# EAGLE board IRAMX-drv-v3.2 (EAGLE 7.2.0)
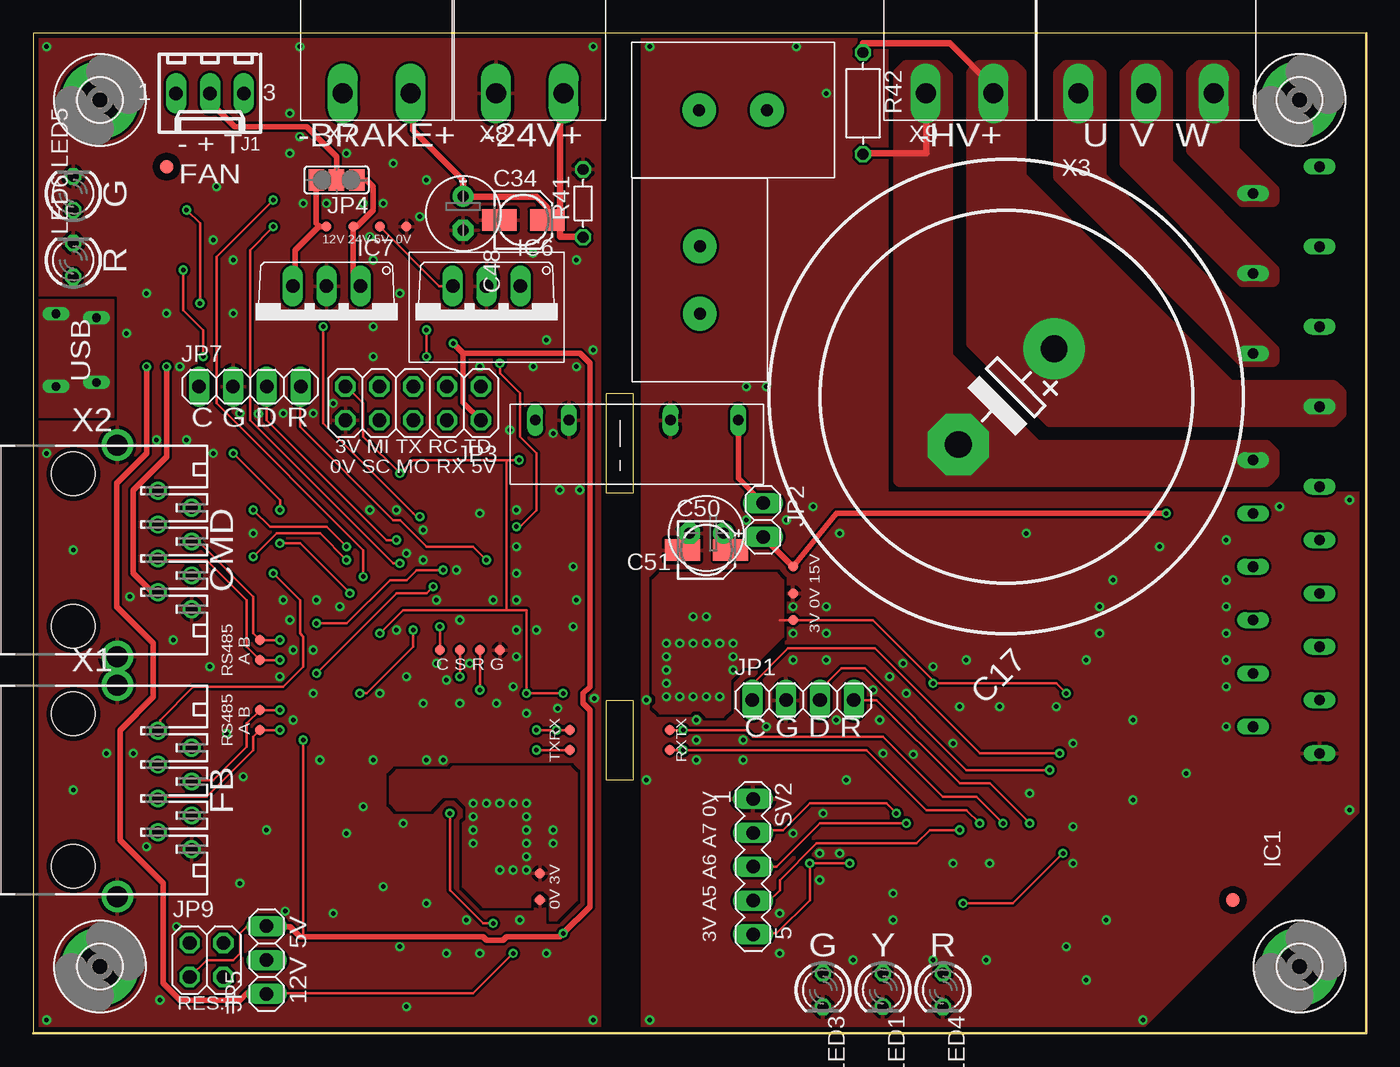
[diagram p0: board, top side]
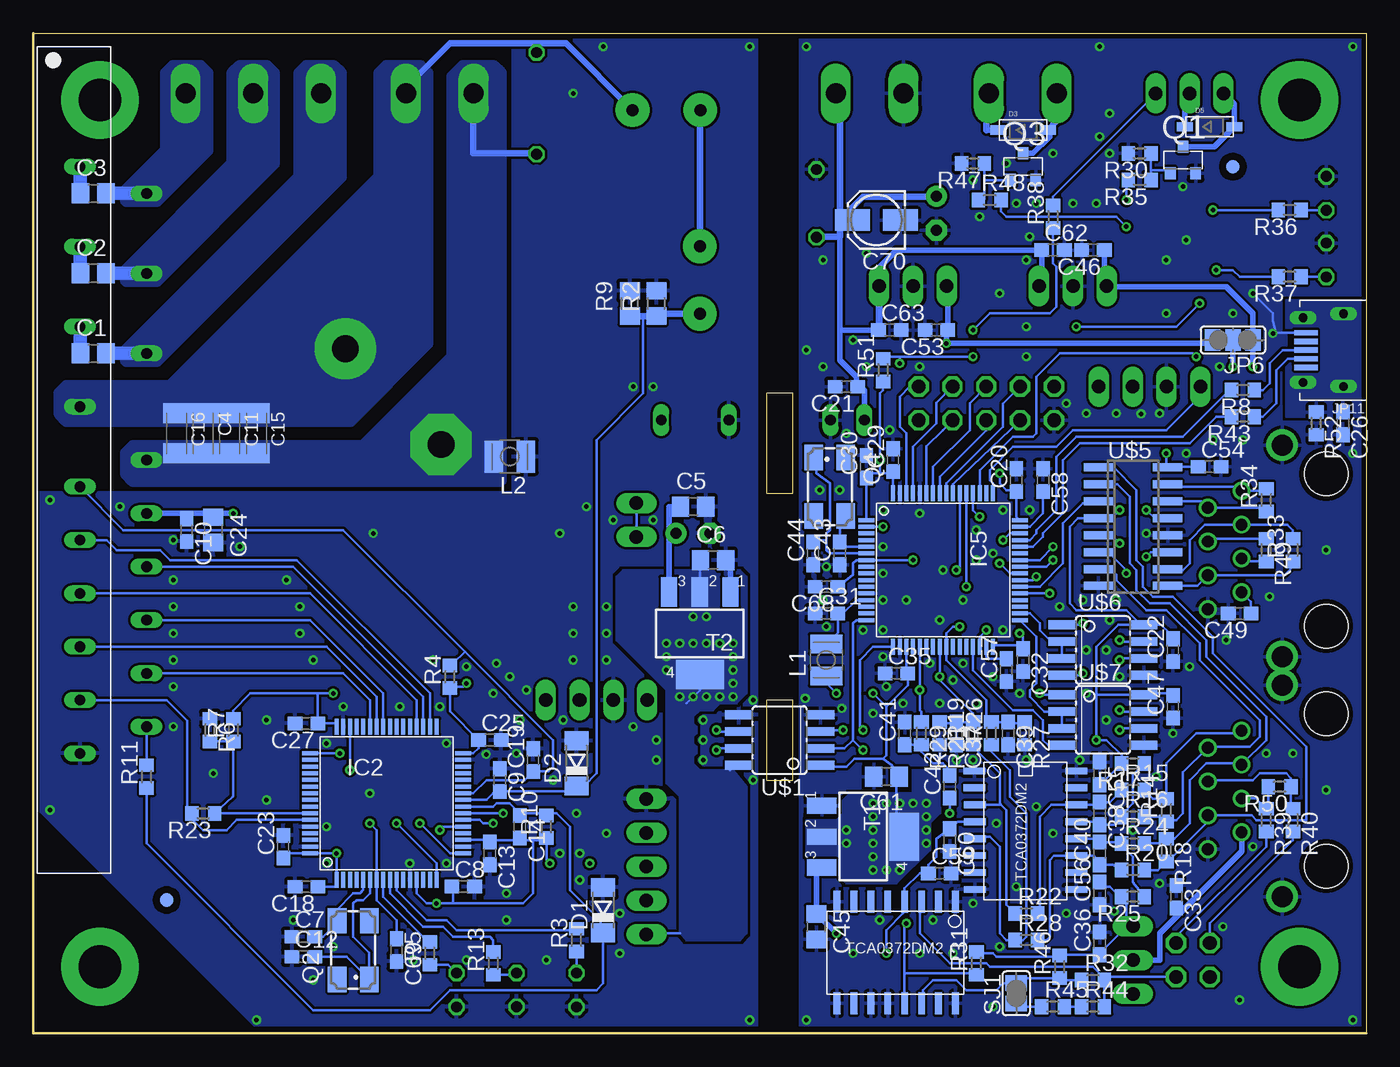
[diagram p1: board, bottom side, seen from below]

Size 100 x 75 mm. Coordinates in mm from the lower left corner, seen from the top.
Outline: 0,0 100,0 100,75 0,75 0,0
Outline: 43,48 45,48 45,40.5 43,40.5 43,48
Outline: 43,25 45,25 45,19 43,19 43,25
Copper layers (1*16): Top 0.0356mm / dielectric 1.5011mm / Bottom 0.0356mm
Design rules "osh *": minimum track width 6mil, minimum drill 13mil, track to track 6mil, track to pad 6mil, pad to pad 6mil, via to via 6mil, smd to smd 6mil, copper to edge 15mil, drill to drill 6mil, minimum pad ring 7mil, minimum via ring 7mil, stop-mask expansion 3mil, vias tented up to drill 13mil, thermal gap 10mil
Net classes: 0 default: width 0.2 mm, drill 0.1 mm, clearance 0.19 mm; 1 dick: width 3.5 mm, clearance 1 mm; 2 iso: width 0.5 mm, clearance 1 mm; 3 iso1: width 0.5 mm, clearance 1 mm; 4 iso2: width 0.5 mm, clearance 1 mm; 5 iso3: width 0.5 mm, clearance 1 mm; 6 iso4: width 0.5 mm, clearance 1 mm

## Footprints (pad centres in the part's own frame; a part is rotated, then mirrored left to right if it is on the bottom)
C0805 = smd 1.3 x 1.5: 1 -0.95,0; 2 0.95,0
C1206K = smd 1.5 x 2: 1 -1.5,0; 2 1.5,0
C0603 = smd 1.1 x 1: 1 -0.85,0; 2 0.85,0
EB35D = drill 2.007 pad 4.597: + -5.08,0 | drill 2.007 pad 4.597 octagon: - 5.08,0
153CLV-0405 = smd 2.6 x 1.6: + 1.8,0; - -1.8,0
E2,5-6E = drill 0.813 pad 1.575: + -1.27,0 | drill 0.813 pad 1.575 octagon: - 1.27,0
SOD80C = smd 1.4 x 1.8: A 1.7,0; C -1.7,0
SOD-123 = smd 1.2 x 0.7: A 1.85,0; C -1.85,0
3,2-PAD = drill 3.2 pad 5.842: B3,2 0,0
SIP23_TOP = drill 0.8 long: 1 2,-5; 2 0,0; 4 -4,-5; 5 -6,0; 7 -10,-5; 8 -12,0; 10 -16,-5; 12 -20,0; 13 -22,-5; 14 -24,0; 15 -26,-5; 16 -28,0; 17 -30,-5; 18 -32,0; 19 -34,-5; 20 -36,0; 21 -38,-5; 22 -40,0; 23 -42,-5
LQFP64 = smd 0.3 x 1.2: 1 -3.75,-5.75; 2 -3.25,-5.75; 3 -2.75,-5.75; 4 -2.25,-5.75; 5 -1.75,-5.75; 6 -1.25,-5.75; 7 -0.75,-5.75; 8 -0.25,-5.75; 9 0.25,-5.75; 10 0.75,-5.75; 11 1.25,-5.75; 12 1.75,-5.75; 13 2.25,-5.75; 14 2.75,-5.75; 15 3.25,-5.75; 16 3.75,-5.75; 33 3.75,5.75; 34 3.25,5.75; 35 2.75,5.75; 36 2.25,5.75; 37 1.75,5.75; 38 1.25,5.75; 39 0.75,5.75; 40 0.25,5.75; 41 -0.25,5.75; 42 -0.75,5.75; 43 -1.25,5.75; 44 -1.75,5.75; 45 -2.25,5.75; 46 -2.75,5.75; 47 -3.25,5.75; 48 -3.75,5.75 | smd 1.2 x 0.3: 17 5.75,-3.75; 18 5.75,-3.25; 19 5.75,-2.75; 20 5.75,-2.25; 21 5.75,-1.75; 22 5.75,-1.25; 23 5.75,-0.75; 24 5.75,-0.25; 25 5.75,0.25; 26 5.75,0.75; 27 5.75,1.25; 28 5.75,1.75; 29 5.75,2.25; 30 5.75,2.75; 31 5.75,3.25; 32 5.75,3.75; 49 -5.75,3.75; 50 -5.75,3.25; 51 -5.75,2.75; 52 -5.75,2.25; 53 -5.75,1.75; 54 -5.75,1.25; 55 -5.75,0.75; 56 -5.75,0.25; 57 -5.75,-0.25; 58 -5.75,-0.75; 59 -5.75,-1.25; 60 -5.75,-1.75; 61 -5.75,-2.25; 62 -5.75,-2.75; 63 -5.75,-3.25; 64 -5.75,-3.75
R-78E = drill 1.016 long: 1 -2.54,-2.54; 2 0,-2.54; 3 2.54,-2.54
TO220V = drill 1.016 long: 1 -2.54,-2.54; 2 0,-2.54; 3 2.54,-2.54
6410-03 = drill 1.016 long: 1 2.54,0; 2 0,0; 3 -2.54,0
1X04 = drill 1.016 long: 1 -3.81,0; 2 -1.27,0; 3 1.27,0; 4 3.81,0
1X02 = drill 1.016 long: 1 -1.27,0; 2 1.27,0
2X05 = drill 1.016 octagon: 1 -5.08,-1.27; 2 -5.08,1.27; 3 -2.54,-1.27; 4 -2.54,1.27; 5 0,-1.27; 6 0,1.27; 7 2.54,-1.27; 8 2.54,1.27; 9 5.08,-1.27; 10 5.08,1.27
SJ_2 = smd 1.168 x 1.6: 1 -1.524,0; 2 0,0; 3 1.524,0
1X03 = drill 1.016 long: 1 -2.54,0; 2 0,0; 3 2.54,0
2X02 = drill 1.016 octagon: 1 -1.27,-1.27; 2 -1.27,1.27; 3 1.27,-1.27; 4 1.27,1.27
FCI-10103594-0001LF = smd 0.4 x 1.75: 1 -1.3,4.525; 2 -0.65,4.525; 3 0,4.525; 4 0.65,4.525; 5 1.3,4.525 | drill 0.65 pad 1 long: 6 2.425,4.73; 7 2.725,1.7; 8 -2.725,1.7; 9 -2.425,4.73
L2825P = smd 1.4 x 2.4: 1 -1.2,0; 2 1.2,0
LED3MM = drill 0.813 octagon: A -1.27,0; K 1.27,0
MICRO3 = smd 0.8 x 0.9: 1 -0.95,-1; 2 0.95,-1; 3 0,1
CTS406 = smd 1.9 x 1.4: 1 -2.2,-1.2; 2 2.2,-1.2; 3 2.2,1.2; 4 -2.2,1.2
CER = drill 0.9 pad 2.54: P$1 -2.54,0; P$2 2.54,0
R0805 = smd 1.3 x 1.5: 1 -0.95,0; 2 0.95,0
R0603 = smd 1 x 1.1: 1 -0.85,0; 2 0.85,0
R-5 = drill 0.813 octagon: 1 -2.54,0; 2 2.54,0
R-7,5 = drill 0.813 octagon: 1 -3.81,0; 2 3.81,0
SJ = smd 1.168 x 1.6: 1 -0.762,0; 2 0.762,0
MA05-1 = drill 1.016 long: 1 -5.08,0; 2 -2.54,0; 3 0,0; 4 2.54,0; 5 5.08,0
SOT223 = smd 1.219 x 2.235: 1 -2.311,-3.099; 2 0,-3.099; 3 2.311,-3.099 | smd 3.6 x 2.2: 4 0,3.099
PAD.03X.03 = smd 0.762 x 0.762: P$1 0,0
SOIC08 = smd 0.66 x 2.032: 1 -1.905,-3.073; 2 -0.635,-3.073; 3 0.635,-3.073; 4 1.905,-3.073; 5 1.905,3.073; 6 0.635,3.073; 7 -0.635,3.073; 8 -1.905,3.073
SIP7 = drill 0.8 long: 1 -6.35,0; 2 -3.81,0; 3 3.81,0; 4 8.89,0
TCA0372DM2 = smd 0.508 x 1.651: 1 -4.434,-3.878; 2 -3.163,-3.878; 3 -1.893,-3.868; 4 -0.624,-3.868; 5 0.646,-3.868; 6 1.917,-3.868; 7 3.187,-3.868; 8 4.457,-3.868; 9 4.457,3.748; 10 3.187,3.748; 11 1.917,3.748; 12 0.646,3.748; 13 -0.624,3.748; 14 -1.893,3.748; 15 -3.163,3.748; 16 -4.434,3.748
SO16 = smd 0.6 x 2.2: 1 -4.445,-2.6; 2 -3.175,-2.6; 3 -1.905,-2.6; 4 -0.635,-2.6; 5 0.635,-2.6; 6 1.905,-2.6; 7 3.175,-2.6; 8 4.445,-2.6; 9 4.445,2.6; 10 3.175,2.6; 11 1.905,2.6; 12 0.635,2.6; 13 -0.635,2.6; 14 -1.905,2.6; 15 -3.175,2.6; 16 -4.445,2.6
FIDUCIAL_1MM = smd 1 x 1: 1 0,0
RJ45 = drill 0.889: 1 -4.445,6.35; 2 -3.175,8.89; 3 -1.905,6.35; 4 -0.635,8.89; 5 0.635,6.35; 6 1.905,8.89; 7 3.175,6.35; 8 4.445,8.89 | drill 1.575 pad 2.184: G3 -7.874,3.302; G4 8.001,3.302 | hole 3.251: -5.715,0; 5.715,0
AKL230-03 = drill 1.5 long: 1 -5.08,0; 2 0,0; 3 5.08,0
AKL230-02 = drill 1.5 long: 1 -2.54,0; 2 2.54,0

## Placement (x,y rotation side)
C1  4.7u  [C0805]  95.5,51 0 bottom
C2  4.7u  [C0805]  95.5,57.01 0 bottom
C3  4.7u  [C0805]  95.5,63 0 bottom
C4  100p  [C1206K]  87.25,45 270 bottom
C5  4.7u  [C0805]  50.5,39.5 0 bottom
C6  4.7u  [C0805]  49,35.5 0 bottom
C7  18p  [C0603]  79.75,7.25 0 bottom
C8  100n  [C0603]  67.75,11 0 bottom
C9  100n  [C0603]  65,19 270 bottom
C10  100n  [C0603]  88.5,37.75 270 bottom
C11  10n  [C1206K]  85.25,45 270 bottom
C12  18p  [C0603]  79.75,5.75 0 bottom
C13  100n  [C0603]  65.75,13.5 270 bottom
C14  100n  [C0603]  63.5,15.5 270 bottom
C15  100p  [C1206K]  83.25,45 270 bottom
C16  10n  [C1206K]  89.25,45 270 bottom
C17  820µ  [EB35D]  73,47.75 225 top
C18  100n  [C0603]  79.5,11 180 bottom
C19  100n  [C0603]  62.5,20.5 90 bottom
C20  100n  [C0603]  26.25,41.5 90 bottom
C21  100n  [C0603]  39,48.5 180 bottom
C22  100n  [C0603]  14.5,28.75 90 bottom
C23  100n  [C0603]  81.25,14 90 bottom
C24  4.7u  [C0805]  86.5,37.75 270 bottom
C25  100n  [C0603]  65.75,22 0 bottom
C26  10n  [C0603]  1.75,45.75 270 bottom
C27  100n  [C0603]  79.5,23.25 180 bottom
C29  100n  [C0603]  35.5,43 90 bottom
C30  100n  [C0603]  37.5,42.5 90 bottom
C31  100n  [C0603]  40.5,31.5 0 bottom
C32  100n  [C0603]  25.75,28 270 bottom
C33  100n  [C0603]  14.25,10.25 270 bottom
C34  2.2u  [153CLV-0405]  36.75,61 0 top
C35  100n  [C0603]  35.25,27 0 bottom
C36  100n  [C0603]  20,6.75 90 bottom
C37  1n  [C0603]  30.75,22.5 270 bottom
C38  1n  [C0603]  20,16.5 270 bottom
C39  1n  [C0603]  26.88,22.5 270 bottom
C40  1n  [C0603]  20,13.5 90 bottom
C41  100n  [C0603]  34.62,22.5 90 bottom
C42  100n  [C0603]  31.25,18.5 90 bottom
C43  18p  [C0603]  39.5,36 90 bottom
C44  18p  [C0603]  41.5,36 90 bottom
C45  4.7u  [C0805]  41.25,8 270 bottom
C46  100n  [C0603]  20.5,58.75 180 bottom
C47  100n  [C0603]  14.5,24.5 90 bottom
C48  2.2u  [E2,5-6E]  32.25,61.5 270 top
C49  100n  [C0603]  9.5,31.5 180 bottom
C50  2.2u  [153CLV-0405]  50.5,36.25 0 top
C51  2.2u  [E2,5-6E]  50.5,37.5 180 top
C53  100n  [C0603]  32.25,52.75 180 bottom
C54  100n  [C0603]  11.75,42.5 0 bottom
C55  100n  [C0603]  20,19.5 270 bottom
C56  100n  [C0603]  20,10.5 90 bottom
C57  2.2u  [C0603]  27,27.25 90 bottom
C58  2.2u  [C0603]  24.25,41.5 270 bottom
C59  100n  [C0603]  32,12 0 bottom
C60  100n  [C0603]  31.25,14.5 270 bottom
C61  4.7u  [C0805]  36,19.25 180 bottom
C62  100n  [C0603]  23.5,58.75 0 bottom
C63  100n  [C0603]  35.75,52.75 0 bottom
C68  100n  [C0603]  40.5,33.5 180 bottom
C69  100n  [C0603]  72.75,6.25 270 bottom
C70  2.2u  [153CLV-0405]  36.75,61 180 bottom
D1  3v3  [SOD80C]  57.25,9.25 90 bottom
D2  3v3  [SOD80C]  59.25,20.25 90 bottom
D3  [SOD-123]  25.75,67.75 0 bottom
D5  [SOD-123]  11.75,68 0 bottom
H1  MOUNT-PAD-ROUND3.2  [3,2-PAD]  95,70 0 top
H2  MOUNT-PAD-ROUND3.2  [3,2-PAD]  95,5 0 top
H3  MOUNT-PAD-ROUND3.2  [3,2-PAD]  5,5 0 top
H4  MOUNT-PAD-ROUND3.2  [3,2-PAD]  5,70 0 top
IC1  IRAMX16UP60B  [SIP23_TOP]  91.5,63 90 top
IC2  STM32F103R6T  [LQFP64]  73.49,17.25 0 bottom
IC5  STM32F405RGT  [LQFP64]  31.75,34.75 270 bottom
IC6  78  [R-78E]  34,53.5 180 top
IC7  7812TV  [TO220V]  22,53.5 180 top
J1  22-27-2031-03  [6410-03]  13.25,70.5 180 top
JP1  [1X04]  57.75,25 0 top
JP2  [1X02]  54.75,38.5 270 top
JP3  [2X05]  28.5,47.25 180 top
JP4  [SJ_2]  22.75,64 180 top
JP5  [1X03]  17.5,5.5 90 top
JP6  [SJ_2]  10,52 180 bottom
JP7  [1X04]  16.25,48.5 0 top
JP9  [2X02]  13,5.5 0 top
JP11  USB-RECEPTABLE  [FCI-10103594-0001LF]  0,51.25 90 bottom
L1  [L2825P]  40.5,28 90 bottom
L2  [L2825P]  64.25,43.25 180 bottom
LED1  GELB  [LED3MM]  63.75,3.25 270 top
LED3  GRÜN  [LED3MM]  59.25,3.25 270 top
LED4  ROT  [LED3MM]  68.25,3.25 270 top
LED5  GRÜN  [LED3MM]  3,63 90 top
LED6  ROT  [LED3MM]  3,58 90 top
Q1  IRLML6344  [MICRO3]  13.75,65.5 0 bottom
Q2  [CTS406]  76,6.25 90 bottom
Q3  IRLML6344  [MICRO3]  25.75,65 0 bottom
Q4  [CTS406]  40.25,41 270 bottom
R1  18k  [CER]  52.5,69.25 180 top
R2  560  [R0805]  53.25,54.75 90 bottom
R3  470  [R0603]  59.25,7 90 bottom
R4  10k  [R0603]  68.75,26.75 90 bottom
R5  470  [R0603]  70.25,6 90 bottom
R6  1k  [R0603]  86.75,22.75 270 bottom
R7  1k  [R0603]  85,22.75 90 bottom
R8  22  [R0603]  9.25,48.25 180 bottom
R9  560  [R0805]  55.25,54.75 90 bottom
R10  10k  [R0603]  61.5,15.49 90 bottom
R11  180  [R0603]  91.5,19.25 90 bottom
R12  18k  [CER]  50,56.5 270 top
R13  470  [R0603]  65.5,5.25 90 bottom
R14  470  [R0603]  15,16.75 90 bottom
R15  1k  [R0603]  17.5,18.25 0 bottom
R16  1k  [R0603]  17.5,16.25 0 bottom
R17  3.9k  [R0603]  17.5,20.25 180 bottom
R18  470  [R0603]  15,13.75 270 bottom
R19  330  [R0603]  29.5,22.5 90 bottom
R20  1k  [R0603]  17.5,12.25 0 bottom
R21  180  [R0603]  32,22.5 270 bottom
R22  3.9k  [R0603]  25.5,9 0 bottom
R23  1k  [R0603]  87.25,16.5 180 bottom
R24  1k  [R0603]  17.5,14.25 0 bottom
R25  3.9k  [R0603]  17.5,10.25 180 bottom
R26  330  [R0603]  28.12,22.5 90 bottom
R27  180  [R0603]  25.62,22.5 270 bottom
R28  3.9k  [R0603]  25.5,7 0 bottom
R29  470  [R0603]  33.38,22.5 270 bottom
R30  1k  [R0603]  17,66 180 bottom
R31  1k  [R0603]  29.25,5.25 90 bottom
R32  3.9k  [R0603]  20.5,4 0 bottom
R33  1k  [R0603]  5.5,36.25 90 bottom
R34  1k  [R0603]  7.5,40 90 bottom
R35  33  [R0603]  17,64 180 bottom
R36  470  [R0603]  5.75,61.75 180 bottom
R37  470  [R0603]  5.75,56.75 180 bottom
R38  1k  [R0603]  23.5,61.25 90 bottom
R39  33  [R0603]  7.5,16 270 bottom
R40  33  [R0603]  5.5,16 270 bottom
R41  VARISTOR-5  [R-5]  41.25,62.25 90 top
R42  VARISTOR-7,5  [R-7,5]  62.25,69.75 270 top
R43  22  [R0603]  9.25,46.25 180 bottom
R44  1k  [R0603]  20.5,2 0 bottom
R45  1k  [R0603]  23.5,2 0 bottom
R46  1k  [R0603]  23,5 90 bottom
R47  1k  [R0603]  29.5,65.25 180 bottom
R48  33  [R0603]  28.25,62.5 0 bottom
R49  180  [R0603]  7.5,36.25 270 bottom
R50  180  [R0603]  6.5,18.5 180 bottom
R51  1k  [R0603]  36.25,49.75 90 bottom
R52  10k  [R0603]  3.75,45.75 270 bottom
SJ1  [SJ]  26.25,3 90 bottom
SV2  [MA05-1]  54,12.5 270 top
T1  zldo1117  [SOT223]  37.75,14.75 270 bottom
T2  zldo1117  [SOT223]  50,30 180 bottom
TP1  TEST-POINT3  [PAD.03X.03]  40.25,21.25 0 top
TP2  TEST-POINT3  [PAD.03X.03]  40.25,22.75 0 top
TP3  TEST-POINT3  [PAD.03X.03]  33.5,28.75 0 top
TP4  TEST-POINT3  [PAD.03X.03]  32,28.75 0 top
TP5  TEST-POINT3  [PAD.03X.03]  30.5,28.75 0 top
TP6  TEST-POINT3  [PAD.03X.03]  17,24.25 0 top
TP7  TEST-POINT3  [PAD.03X.03]  17,22.75 0 top
TP8  TEST-POINT3  [PAD.03X.03]  17,29.5 0 top
TP9  TEST-POINT3  [PAD.03X.03]  17,28 0 top
TP10  TEST-POINT3  [PAD.03X.03]  24,60.5 0 top
TP11  TEST-POINT3  [PAD.03X.03]  26,60.5 0 top
TP12  TEST-POINT3  [PAD.03X.03]  22,60.5 0 top
TP13  TEST-POINT3  [PAD.03X.03]  57,35 0 top
TP14  TEST-POINT3  [PAD.03X.03]  57,31 0 top
TP15  TEST-POINT3  [PAD.03X.03]  47.75,21.25 0 top
TP16  TEST-POINT3  [PAD.03X.03]  47.75,22.75 0 top
TP17  TEST-POINT3  [PAD.03X.03]  28,60.5 0 top
TP18  TEST-POINT3  [PAD.03X.03]  35,28.75 0 top
TP19  TEST-POINT3  [PAD.03X.03]  57,33 0 top
TP20  TEST-POINT3  [PAD.03X.03]  38,12 0 top
TP21  TEST-POINT3  [PAD.03X.03]  38,10 0 top
U$1  SI8621  [SOIC08]  44,22 90 bottom
U$2  rk-2415s  [SIP7]  44,46 0 top
U$3  TCA0372DWDM2  [TCA0372DM2]  25.5,15.25 270 bottom
U$4  TCA0372DWDM2  [TCA0372DM2]  35.25,6 180 bottom
U$5  AM26LS32ACD  [SO16]  17.5,38 270 bottom
U$6  ADM485SOIC8  [SOIC08]  19.75,28.75 270 bottom
U$7  ADM485SOIC8  [SOIC08]  19.75,23.5 270 bottom
U$8  FIDUCIAL  [FIDUCIAL_1MM]  90,10 0 bottom
U$9  FIDUCIAL  [FIDUCIAL_1MM]  10,65 0 bottom
U$10  FIDUCIAL  [FIDUCIAL_1MM]  10,65 0 top
U$11  FIDUCIAL  [FIDUCIAL_1MM]  90,10 0 top
X1  [RJ45]  3,18.25 270 top
X2  [RJ45]  3,36.25 270 top
X3  [AKL230-03]  83.5,70.5 0 top
X7  [AKL230-02]  25.75,70.5 0 top
X8  [AKL230-02]  37.25,70.5 0 top
X9  [AKL230-02]  69.5,70.5 0 top

## Library data of the parts
C1-C27 C29-C51 C53-C63 C68-C70 R2-R11 R13-R40 R43-R52 = rcl
D1 D2 = diode
D3 D5 U$8-U$11 = adafruit
H1-H4 = holes
IC1 = iram-b
IC2 IC5 = micro-stm_v2
IC6 JP11 Q1 Q3 R1 R12 U$1 U$2 U$5-U$7 X1 X2 = reroolib
IC7 = linear
J1 = con-molex; OC_FARNELL: unknown; OC_NEWARK: unknown
JP1-JP3 JP5 JP7 JP9 = pinhead
JP4 JP6 SJ1 = jumper
L1 L2 = resistor
LED1 LED3-LED6 = led
Q2 Q4 = crystal; OC_FARNELL: unknown; OC_NEWARK: unknown
R41 R42 = varistor
SV2 = con-lstb; OC_FARNELL: unknown; OC_NEWARK: unknown
T1 T2 = zetex; MPN: DJT4031N-13; OC_FARNELL: 1710672; OC_NEWARK: 25R4490
TP1-TP21 = SparkFun-Passives
U$3 U$4 = tca0372dw
X3 X7-X9 = reroolib; OC_FARNELL: unknown; OC_NEWARK: unknown

## Nets
+3V3_DRV: C6.1 C8.1 C13.1 C14.2 C18.1 C23.1 C25.1 C27.1 IC2.1 IC2.13 IC2.19 IC2.32 IC2.48 IC2.64 R4.1 R7.2 R10.1 SV2.5 T2.2 T2.4 TP14.P$1 U$1.8
+3V3_RES: C20.1 C29.1 C30.1 C32.1 C35.2 C61.1 IC5.1 IC5.19 IC5.32 IC5.48 IC5.64 JP3.9 L1.1 R51.1 T1.2 T1.4 TP20.P$1 U$1.1
+5V_RES: C22.2 C36.1 C45.1 C47.2 C53.1 C54.1 C55.2 C56.2 IC6.3 JP3.2 JP5.3 JP6.3 JP9.1 R17.2 R25.2 R31.2 R46.2 T1.3 TP11.P$1 U$5.4 U$5.16 U$6.8 U$7.8
+12V_RES: C46.1 C59.1 C60.1 IC7.3 JP4.3 JP5.1 JP6.1 TP12.P$1 U$3.4 U$4.4
+15V_DRV: C5.1 C10.1 C24.1 C50.+ C51.+ IC1.14 JP2.1 JP2.2 T2.3 TP13.P$1 U$2.4
+24V_RES: C21.1 C34.+ C48.+ C62.1 C63.1 C70.+ D3.C IC6.1 IC7.1 JP4.1 R41.1 TP10.P$1 U$2.1 X7.2 X8.2
AMP: C14.1 D1.C IC2.24 R10.2 R11.1
BRAKE: IC5.40 R48.2
CAN_RX/I2C_SCK: IC5.61 JP3.3
CAN_TX/I2C_SDA: IC5.62 JP3.1
COS: C39.1 IC5.25 R26.2 R27.1 TP5.P$1
E: IC2.58 R6.2 R7.1 R23.1
EN: IC1.21 IC2.59 R23.2
G: IC2.10 R3.2
G_RES: IC5.52 R36.2
GND_DRV: C5.2 C6.2 C7.1 C8.2 C9.1 C10.2 C12.1 C13.2 C18.2 C19.2 C23.2 C24.2 C25.2 C27.2 C50.- C51.- C69.2 D1.A D2.A IC1.23 IC2.12 IC2.18 IC2.31 IC2.47 IC2.60 IC2.63 JP1.2 L2.1 LED1.K LED3.K LED4.K R2.2 R6.1 R9.2 SV2.1 T2.1 TP19.P$1 U$1.5 U$2.3
GND_RES: C20.2 C21.2 C22.1 C26.2 C29.2 C30.2 C31.1 C32.2 C33.1 C34.- C35.1 C36.2 C37.2 C39.2 C41.2 C43.1 C44.1 C45.2 C46.2 C47.1 C48.- C49.2 C53.2 C54.2 C55.1 C56.1 C57.1 C58.1 C59.2 C60.2 C61.2 C62.2 C63.2 C68.2 C70.- IC5.12 IC5.18 IC5.60 IC5.63 IC6.2 IC7.2 JP3.10 JP7.2 JP11.5 LED5.K LED6.K Q1.2 Q3.2 R21.2 R27.2 R30.2 R41.2 R47.2 R52.2 T1.1 TP17.P$1 TP18.P$1 TP21.P$1 U$1.4 U$2.2 U$3.1 U$3.8 U$3.9 U$3.16 U$4.1 U$4.8 U$4.9 U$4.11 U$4.12 U$4.16 U$5.8 U$5.12 U$6.5 U$7.5 X1.8 X1.G3 X1.G4 X2.8 X2.G3 X2.G4 X8.1
ITRIP: IC1.22 R11.2
MISO: IC5.56 JP3.7
MOSI: IC5.57 JP3.6
N$1 [iso]: C1.1 IC1.7
N$2 [iso]: R1.P$2 R12.P$1
N$3 [iso]: C2.1 IC1.4
N$4: IC2.21 SV2.4
N$5 [iso]: C3.1 IC1.1
N$6: R44.1 R45.2
N$8: LED3.A R3.1
N$9: LED4.A R5.1
N$10: C7.2 IC2.5 Q2.3
N$11: LED5.A R36.1
N$12: C12.2 IC2.6 Q2.1
N$13: C58.2 IC5.47
N$14: C57.2 IC5.31
N$15: C44.2 IC5.6 Q4.1
N$16: C33.2 JP5.2 X1.7
N$17: JP9.4 R39.2
N$18: R19.1 R22.1 U$3.3
N$19: C38.2 R16.1 R17.1 U$3.13
N$20: LED6.A R37.1
N$21: JP9.2 R40.2
N$22: IC5.45 R8.2
N$23: IC5.44 R43.2
N$24: C40.2 R24.1 R25.1 U$3.12
N$25: C49.1 JP6.2 X2.7
N$26: R26.1 R28.1 U$3.5
N$27: R40.1 R50.1 TP6.P$1 U$7.7 X1.4
N$28: C40.1 R20.1 R28.2 U$3.11
N$29: R34.2 U$5.15 X2.1
N$30: C41.1 C42.2 R29.2
N$31: C42.1 R31.1 U$4.13
N$32: C38.1 R15.1 R22.2 U$3.14
N$33: JP9.3 R32.2 R44.2 U$4.3
N$34: R39.1 R50.2 TP7.P$1 U$7.6 X1.5
N$36: R34.1 U$5.14 X2.2
N$37: R33.2 U$5.10 X2.3
N$38: R33.1 U$5.9 X2.6
N$39: C43.2 IC5.5 Q4.3
N$40: R18.2 R20.2 U$5.1 X1.6
N$41: R14.1 R16.2 U$5.7 X1.2
N$42: D5.A J1.1 Q1.3
N$43: LED1.A R13.1
N$44: Q1.1 R30.1 R35.1
N$45: J1.3 R38.2
N$46: C31.2 IC5.13 L1.2
N$47: R14.2 R15.2 U$5.6 X1.1
N$48: R32.1 R46.1 SJ1.2 U$4.14
N$49: IC2.22 SV2.3
N$50: R18.1 R24.2 U$5.2 X1.3
N$51: IC2.23 SV2.2
N$52: D5.C J1.2 JP4.2
N$54: R45.1 SJ1.1
N$57: R49.2 TP9.P$1 U$6.6 X2.5
N$58: R49.1 TP8.P$1 U$6.7 X2.4
N$61: D3.A Q3.3 X7.1
N$62: Q3.1 R47.1 R48.1
NRST_RES: C68.1 IC5.7 JP7.4
PWM: IC5.39 R35.2
R: IC2.8 R5.2
R_RES: IC5.51 R37.2
RES: IC5.21 R29.1 TP3.P$1
RST: C69.1 IC2.7 JP1.4
RX: IC2.17 TP15.P$1 U$1.7
RX1_RES: IC5.59 JP3.4
RX2_RES: IC5.17 TP2.P$1 U$1.3
SCK: IC5.55 JP3.8
SIN: C37.1 IC5.24 R19.2 R21.1 TP4.P$1
SWCLK: IC2.49 JP1.1
SWCLK_RES: IC5.49 JP7.1
SWDIO: IC2.46 JP1.3
SWDIO_RES: IC5.46 JP7.3
TACHO: IC5.2 R38.1 R51.2
TIM1_1: IC1.18 IC2.41
TIM1_1N: IC1.15 IC2.34
TIM1_2: IC1.19 IC2.42
TIM1_2N: IC1.16 IC2.35
TIM1_3: IC1.20 IC2.43
TIM1_3N: IC1.17 IC2.36
TIM1_A: IC5.42 U$5.13
TIM1_B: IC5.41 U$5.11
TIM3_A: IC5.38 U$5.3
TIM3_B: IC5.37 U$5.5
TX: IC2.16 TP16.P$1 U$1.6
TX1_RES: IC5.58 JP3.5
TX2_RES: IC5.16 TP1.P$1 U$1.2
U [dick]: C1.2 IC1.8 X3.1
USART3_RX: IC5.30 U$7.1
USART3_TX: IC5.29 U$7.4
USART3_TXEN: IC5.33 U$7.2 U$7.3
USART5_RX: IC5.54 U$6.1
USART5_TX: IC5.53 U$6.4
USART5_TXEN: IC5.34 U$6.2 U$6.3
USB_DM: JP11.2 R43.1
USB_DP: JP11.3 R8.1
USB_SHIELD: C26.1 JP11.6 JP11.7 JP11.8 JP11.9 R52.1
V [dick]: C2.2 IC1.5 X3.2
V+ [dick]: C4.1 C11.1 C15.1 C16.1 C17.+ IC1.10 R1.P$1 R42.1 X9.2
V-: C4.2 C11.2 C15.2 C16.2 C17.- IC1.12 L2.2 R42.2 X9.1
VLT: C9.2 D2.C IC2.25 R2.1 R9.1 R12.P$2
VTH: C19.1 IC1.13 IC2.26 R4.2
W [dick]: C3.2 IC1.2 X3.3
Y: IC2.9 R13.2

## Tracks (layer width: path | path; a pad name or v marks a point on that pad's centre or on a via)
+3V3_DRV  (via drill 0.33)
  Top 0.2: v77.5,25.5 76.75,26.25 v67.5,26.25 67.5,26.5 63,31 TP14.P$1 56,31 | v61.25,12.75 v58.25,12.75 58.25,10 55.75,7.5 54.08,7.5 SV2.5 | v77.25,13.5 73.5,9.75 v69.75,9.75
  Bottom 0.2: 63.25,14.5 C14.2 63.5,14.5 | 62.5,14.5 61.55,14.5 R10.1 61.5,13 v61.25,12.75 | 62.5,14.5 62.5,10.5 63.25,9.75 68.5,9.75 | 84.75,24 85.05,23.7 R7.2 85,24.2 83.75,25.5 v77.5,25.5 78.65,25.5 C27.1 77.24,23.25 IC2.48 | 47.75,20.09 U$1.8 | 47.75,20.09 47.8,20.05 47.8,20 | 50,25.75 51,24.75 | 62.5,14.5 63.5,14.5 | 63.5,14.5 65.75,14.5 C13.1 65.75,14.5 IC2.19 | v67.5,26.25 67.75,26 68.4,26 R4.1 68.75,24.15 C25.1 66.6,21.4 67,21 IC2.32 | C23.1 81.25,13.5 IC2.64 77.75,13.5 v77.25,13.5 IC2.1 77.25,11 C18.1 | T2.2 50,35.45 C6.1 | 68.5,9.75 68.5,10.9 C8.1 | 68.5,9.75 v69.75,9.75 70.5,9.75 71.25,10.5 IC2.13 | 51.5,7.5 54,7.5 SV2.5 | 47.75,20.09 47.75,19.75
  other vias: 49.5,29.25 50.5,29.25 51.5,29.25 48.5,29.25 47.5,29.25 50.5,31.25 49.5,31.25 47.5,28.25 47.5,27.25 47.5,26.25 52.5,29.25 47.5,25.25 48.5,25.25 52.5,28.25 49.5,25.25 50.5,25.25 51.5,25.25 52.5,27.25
  pour Bottom (no thermals): 47.25,24.75 48.5,24.75 49,24.25 50,24.25 50.5,23.75 50.5,23.25 50.25,23 50.25,22.5 50.5,22.25 50.5,21.75 50.25,21.5 50.25,21 50.5,20.75 50.5,20.25 50,19.75 47.5,19.75 46.5,18.5 46.5,7.5 47,7 51,7 51.5,7.5 51.5,17.75 52.5,18.75 52.5,25.75 56.25,29.5 56.25,34.25 55.75,34.75 47,34.75 46.5,34.25 46.5,25.5
  pour Top (no thermals): 46.75,25.25 46.75,24.75 46.5,24.5 47,24 49.25,24 49.5,24.25 50,24.25 50.5,23.75 51.75,23.75 52.25,24.25 52.25,26.5 53.25,27.5 54,27.5 56.25,29.75 56.25,34 55.75,34.5 47,34.5 46.5,34 46.5,25.5
+3V3_RES  (via drill 0.33)
  Top 0.2: v39.75,25.5 v37,25.5 37,31.75 35.5,31.75 | 35.5,31.75 27.75,31.75 v26,30 | 35.5,43 28.5,43 v27.5,42 24.75,44.75 24.75,47.25 23.92,48.08 JP3.9 | 35.5,31.75 35.5,43 | v36.45,43 35.5,43
  Bottom 0.2: U$1.1 40.75,20 39,20 38.41,20.59 36.25,20.59 | 36.25,20.59 35.59,20.09 35.25,19.75 35.25,19.2 | 35.25,19.2 C61.1 | IC5.32 27.85,29.1 25.9,29.1 25.75,29 C32.1 25.75,29.75 v26,30 | IC5.48 26.25,38.75 C20.1 26.35,40.75 27,40.75 27.5,41.25 v27.5,42 | IC5.1 C30.1 37.35,42 36.5,42 | IC5.64 C29.1 35.65,42 36.5,42 | IC5.19 34.5,27.35 C35.2 34.4,26.1 36,24.5 | 36,24.5 36,20.84 36.25,20.59 | 35.25,19.2 35.25,14.85 T1.4 | L1.1 40.5,26.25 v39.75,25.5 | v37,25.5 36,24.5 | 36.5,42 36.5,42.75 v36.45,43 36.5,43 36.5,48 36.25,48.25 R51.1
  other vias: 39,15.25 36,17.25 37,16.25 37,15.25 37,14.25 37,13.25 37,12.25 39,14.25 34,17.25 35,12.25 37,17.25 33,14.25 33,15.25 33,16.25 33,17.25 35,17.25 36,12.25
  pour Bottom (no thermals): 32.75,13.75 32.75,15.75 32,16.5 32,19.75 34,19.75 34,18 38.75,18 39.25,17.5 39.25,16.5 39.75,16 42,16 42,13.25 41,13.25 39,11.25 35.25,11.25
  pour Top: 32.25,11 33.75,9.5 37.25,9.5 37.25,10.25 37.75,10.75 38.25,10.75 38.75,10.25 38.75,8.5 39.25,8.5 40.75,10 40.75,19.5 40.25,20 31.5,20 31.25,19.75 27.25,19.75 26.75,19.25 26.75,17.25 27.25,16.75 29.75,16.75 30.75,17.75 31.75,17.75 32.5,17 32.5,16 32.25,15.75
+5V_RES  (via drill 0.33)
  Top 0.2: v18.5,39.25 18.5,40 v15,43.5 | JP9.1 13,5.5 15,5.5 15.5,6 15.5,7.5 16,8 17.46,8 JP5.3 | v20.25,22 20.25,7.25 | TP11.P$1 30.46,56.04 IC6.3
  Top 0.4: 32.25,51 41,51 41.75,50.25 41.75,26 41.25,25.5 41.25,24.75 41.75,24.25 41.75,9.5 v39.75,7.5 39.5,7.25 35.5,7.25 35.25,7 34,7 33.75,7.25 20.25,7.25 20,7.25 19.25,8 17.54,8 JP5.3 | 32.25,51 v31.5,51.75 | JP3.2 32.25,47.31 32.25,51
  Bottom 0.2: R25.2 18.5,10.25 | 18.5,10.25 19.25,11 19.9,11 C56.2 20.4,11.6 20,11.5 | U$7.8 16.33,25.5 14.75,25.5 C47.2 | 16.58,25.25 U$7.8 | U$5.16 14.95,42.45 | C22.2 14.75,30 15.4,30.66 U$6.8 | 41.25,12.29 T1.3 | C54.1 14.85,42.5 U$5.16 | v18.5,39.25 19.11,38.63 U$5.4 21.61,38.63 22.25,38 22.25,32.25 21.75,31.75 18,31.75 16.75,30.5 16.75,30.58 U$6.8 | v15,43.5 15,42.55 U$5.16 | R31.2 29.15,6 28,6 27.75,5.75 23.15,5.75 R46.2 22.95,5.9 C36.1 20,6 18,8 17.54,8 JP5.3 18,8.75 18,10.29 18.5,10.25 | 20.25,25.41 20.25,29 18.59,30.66 U$6.8 | 20.25,25.41 v20.25,22 19.5,22 18.35,20.85 R17.2 19.95,18.65 C55.2 | U$7.8 20.25,25.41
  Bottom 0.4: 41.25,12.29 C45.1 41.2,8.95 v39.75,7.5 | IC6.3 31.4,55.98 C53.1 31.5,52.65 v31.5,51.75 11.77,51.75 JP6.3
+12V_RES  (via drill 0.33)
  Top 0.2: v36,6 33,3 17.54,3 JP5.1
  Top 0.4: v8.5,50 8.5,43.5 6.25,41.25 6.25,32 9,29.25 9,25.25 6.5,22.75 6.5,14.5 9.75,11.25 9.75,3.75 11,2.5 15.5,2.5 16,3 17.46,3 JP5.1 | JP4.3 21.23,60.77 21.5,60.5 | TP12.P$1 21.5,60.5 | 21.5,60.5 21.4,60.5 C46.1 19.65,56.23 IC7.3
  Bottom 0.2: U$3.4 30.63,15.87 31.25,15.25 C60.1 32.25,14.6 32.25,13.25 32.85,12.65 C59.1 33.5,12 34.63,10.87 U$4.4 34.75,9.74 34.75,9 36,7.75 v36,6
  Bottom 0.4: v8.5,50 8.5,51.98 | 8.5,51.98 JP6.1 | C46.1 19.65,56.23 IC7.3 19.42,56 10.5,56 8.5,54 8.5,51.98
+15V_DRV  (via drill 0.33)
  Top 0.4: C51.+ 52.3,37.5 C50.+ 54.53,37.23 JP2.2 | TP13.P$1 60.25,39 v85,39 | U$2.4 52.89,41.63 JP2.1
  Top 0.406: TP13.P$1 54.75,37.25 JP2.2
  Bottom 0.2: 88.5,38.75 C10.1 88.78,39.03 | JP2.1 JP2.2
  Bottom 0.4: 52.31,37.5 52.31,39.5 C5.1 | 52.31,37.5 T2.3 | C51.+ 52.31,37.5 | v85,39 86.5,39 | 86.5,39 88.5,39 | 88.5,39 IC1.14 | C24.1 86.5,38.76 86.5,39 | C10.1 88.5,39
+24V_RES
  Top 0.2: TP10.P$1 24.25,60.5
  Top 0.4: 32.27,62.75 C48.+ | R41.1 41.25,59.75 | TP10.P$1 24,56.58 IC7.1 | 24.25,60.5 25.5,61.75 25.5,63.5 25,64 JP4.1
  Top 0.406: C34.+ 38.55,61.95 | 39.5,70.59 39.79,70.59 X8.2 | 28.5,70.42 28.29,70.42
  Top 0.5: 28.5,70.42 28.5,67.75 32.25,64 C48.+ | 38.55,61.95 37.75,62.75 32.27,62.75 | 41.25,59.75 39.5,59.75 39.5,70.59 | 28.29,70.42 X7.2
  Bottom 0.4: C63.1 36.6,55.98 IC6.1 36.54,57.46 36.5,57.5 | IC7.1 24.35,56.23 C62.1 35.25,58.75 36.5,57.5 | 36.5,57.5 36.5,53 36.75,52.75 39.5,52.75 | 39.5,52.75 39.5,50.5 38.25,49.25 38.25,48.25 C21.1 37.65,48.25 U$2.1 | C34.+ 38.55,61.95 | 32.27,62.75 C48.+ | 39.5,52.75 39.5,59.75 | D3.C 28.5,67.75 | 28.5,70 28.29,70
  Bottom 0.5: C34.+ 39.5,61 | 38.55,61.95 37.75,62.75 32.27,62.75 | 39.5,61 39.5,59.75 41.25,59.75 R41.1 | 39.5,61 39.5,70.64 | 28.5,67.75 28.5,70 | 28.29,70 X7.2 | 39.5,70.75 39.75,70.5 X8.2
AMP
  Bottom 0.2: 63.2,16.45 C14.1 63.5,16.5 | 63.5,16.5 64.25,17.25 65.25,17.25 65.5,17 IC2.24 | R11.1 91.5,14.25 79,1.75 70.25,1.75 68.75,3.25 57.75,3.25 57.25,3.75 57.25,7.25 | 57.25,7.25 57.5,8.5 59.75,10.75 59.75,15.5 60.75,16.5 61.45,16.5 R10.2 61.5,16.5 63.5,16.5 | D1.C 57.25,7.25
BRAKE  (via drill 0.33)
  Top 0.2: v27.5,35.25 27,35.25 16.25,46 16.25,58.75 v18,60.5
  Bottom 0.2: IC5.40 26.75,34.5 v27.5,35.25 | v18,60.5 18.75,61.25 27,61.25 27.4,61.65 R48.2
CAN_RX/I2C_SCK
  Bottom 0.2: IC5.61 34,44 32.25,45.75 32.25,47.31 JP3.3
CAN_TX/I2C_SDA
  Bottom 0.2: JP3.1 34.23,48.52 35,47.75 35,45.5 34.5,45 IC5.62
COS  (via drill 0.33)
  Top 0.2: TP5.P$1 v30.5,30.5
  Bottom 0.2: 25.75,23.5 R27.1 25.75,23.25 26.9,23.25 C39.1 R26.2 28.5,23.6 28.5,25 31.5,28 IC5.25 31.5,30 31,30.5 v30.5,30.5
E
  Bottom 0.2: IC2.58 86.04,16.5 R23.1 85.05,17.75 85,17.8 R7.1 R6.2
EN
  Bottom 0.2: IC2.59 84.75,16 85.5,15.25 87.25,15.25 88,16 88,16.45 R23.2 88.45,17 88.45,23.45 90,25 IC1.21
G
  Bottom 0.2: IC2.10 72.74,10.74 70.5,8.5 69,8.5 68.25,7.75 59.45,7.75 R3.2
G_RES  (via drill 0.33)
  Top 0.2: v29,38.75 28.75,38.75 28.5,39 21.75,45.75 v21.75,53 | v12.5,54.75 12.5,60.75 v11.5,61.75
  Bottom 0.2: IC5.52 29.5,39.25 v29,38.75 | v21.75,53 14.25,53 v12.5,54.75 | v11.5,61.75 R36.2
GND_DRV  (via drill 0.33)
  Bottom 0.406: T2.1 47.69,35.14 C6.2
  other vias: 60.25,23.5 57.25,74 82.5,17.5 59.5,70.5 71.75,12.75 70,28 79,4 80.5,8.5 46.25,1 82.5,23.5 78,12.75 78,21.75 69,21.75 69,12.75 74.75,18 55,23 53.25,22 53.25,20.5 78,15.5 77.5,6.5 76.75,24.5 86.5,19.5 60.5,37.5 56.5,38.5 84.5,36.5 89.5,37 81,34 80,32 80,30 79,28 89.5,26 93.5,39.5 89.5,23 61.5,5.5 67.5,5.5 71.5,5.5 64.5,8.5 64.5,10.5 63.5,23.5 65.5,25.5 65.25,27.75 67.5,27.5 69.5,24.5 63.75,21 74.5,37.5 72.5,24.5 89.5,34 89.5,32 89.5,30 89.5,28 98.75,40 63,25.75 64.25,26.75 59.5,28 57,28 59.5,32 49.75,23.5 83.25,1 98.75,16.75 46.25,74 53.5,48.5 55,48.5 53.5,38.5 58.5,39.5 57,32 49.75,22 59,11.5 57,15 59,13.5 59.25,16.5 56,6 56,9 46,25 46,19 49.75,20.5 60.5,13.5 61,19 66.02,20.92 57,30 59.5,30
  pour Bottom (rank 2): 45.75,75 63.99,75 64,40.5 100,40.5 100,17.25 82.75,0 45.75,0
  pour Top (rank 2): 45.75,75 64,75 64,40.5 100,40.5 100,17.25 82.75,0 45.75,0
GND_RES  (via drill 0.33)
  Bottom 0.2: JP11.5 6.8,52.55 7,53.5 7,54 v8.5,55.5
  other vias: 36,26 34.75,24.75 26,25.5 10.75,8 36.25,30.25 36.25,39.25 40.5,35 32,31 39.5,40.75 25.5,50.75 25.5,53 10.5,29.5 13.25,27.5 18.75,32.5 21.25,32.5 25.25,39.25 28,36 21.5,20.5 29.5,9.75 29.5,20.5 25.5,20.5 14.5,22.5 16.5,37.5 11.5,44.5 37.75,30.25 42,1 32,24.75 40.75,50 42,51.25 33.5,50 18.75,46.5 41,40.75 32.5,8.5 36.5,8.5 33.5,6 38.5,6 27.5,6.5 31,6 28,2 9.5,2.5 15.5,11.25 33.5,39 40.5,30.5 40.75,32.5 26.25,11 31.75,34.75 27.25,30.25 27.25,39.25 40.75,58 18.91,9.17 18.5,26.75 19.5,23.5 19.5,28.75 23,32 19.25,31 21,28.75 23.5,15 27.75,15.75 22.5,47.25 21,46.5 36.25,36.5 36.25,32.5 36.25,34.5 34.5,32.5 30.25,32.5 21,25.5 39.34,24.37 13.5,43.5 3,36.25 3,18.25 20,74 10,54 37.5,58.5 29.25,37.75 29.25,35.5 29.25,24.75 30.25,27.75 28,26.75 30.75,20.5 5.5,21 7.5,21 8.5,14 17.5,15.25 22.5,9 37,24 15,54 15,58 13.5,59.5 15.5,46.5 42.09,25.12 42,74 1,74 1,1 38.5,52 39,45 27.5,55.5 35.75,45.25 37.5,50 16.88,46.47 15.75,19.25 19.25,69 20,67.25 22,62.25 20.25,62.25 24.75,62.25 23.5,66 9.25,44.5 7.25,32.75 7,52.5 1,43.5 19.25,66 11,50 26.25,62.25 29.5,64 29,61.25 25.25,59.75 25.5,58 27,65.25 13.75,63.5 32.75,27.75 31,26.5 36.25,28.25 24.75,17
  pour Bottom (rank 2): 0,0 0,46 6,46 6,55 0,55 0,75 42.5,75 42.5,0
  pour Top (rank 2): 0,0 0,46 6,46 6,55 0,55 0,75 42.5,75 42.5,0
ITRIP
  Bottom 0.2: R11.2 IC1.22
MISO
  Bottom 0.2: JP3.7 27.25,47.23 27.25,45.5 31.5,41.25 IC5.56
MOSI
  Bottom 0.2: JP3.6 28.5,45.25 32,41.75 IC5.57
N$1
  Bottom 1: IC1.7 96.5,51.01 C1.1
N$2
  Bottom 0.5: R12.P$1 50,69.21 R1.P$2
N$3
  Bottom 1: IC1.4 96.5,57.01 C2.1
N$4  (via drill 0.33)
  Top 0.2: v69.5,15.25 67.25,15.25 66.25,14.25 58.75,14.25 56,11.5 56,10.75 55,9.75 54.21,9.75 SV2.4
  Bottom 0.2: IC2.21 69.25,15.5 v69.5,15.25
N$5
  Bottom 0.2: IC1.1
  Bottom 1: IC1.1 C3.1
N$6
  Bottom 0.2: R44.1 R45.2
N$8
  Bottom 0.2: R3.1 LED3.A
N$9
  Bottom 0.2: R5.1 68.88,5.15 LED4.A
N$10
  Bottom 0.2: IC2.5 75.24,10.76 75.5,10.5 76,10.5 77.25,9.25 77.25,8.75 Q2.3 76.95,8.55 78.25,7.25 C7.2
N$11
  Bottom 0.2: R36.1 3.02,61.75 LED5.A
N$12
  Bottom 0.2: C12.2 76.5,5.75 Q2.1 74.8,6.05 76,7.25 76,9.75 75.75,10 75.25,10 74.75,10.5 IC2.6
N$13
  Bottom 0.2: C58.2 24.25,39 25.25,38 IC5.47
N$14
  Bottom 0.2: IC5.31 28.5,28.25 28.35,28.1 C57.2
N$15
  Bottom 0.2: IC5.6 40.25,36 40.5,36.25 40.5,37 | 40.5,37 40.5,37.5 40.25,37.75 40.25,41.25 41.25,42 41.25,42.5 Q4.1 | C44.2 41.6,37 40.5,37
N$16
  Bottom 0.4: X1.7 9.35,13.65 13.88,9.12 | 13.88,9.12 15.5,7.5 15.5,5.5 JP5.2 | C33.2 14.15,9.4 13.88,9.12
N$17
  Bottom 0.2: JP9.4 14.27,7.23 7.5,14 R39.2
N$18
  Bottom 0.2: U$3.3 27.39,17.14 | 27.39,17.14 27,16.75 27,9.65 R22.1 | 27.5,17.29 27.39,17.14 | R19.1 29.5,21.5 27.5,19.5 27.5,17.25 27.39,17.14
N$19
  Bottom 0.2: U$3.13 20.03,15.87 C38.2 18.95,15.65 R16.1 | R16.1 18.25,16.25 | R17.1 17.5,19.4 17.5,17.25 18.35,16.4 R16.1
N$20
  Bottom 0.2: R37.1 3.02,56.75 LED6.A
N$21
  Bottom 0.2: R40.2 5.5,14.5 11.75,8.25 11.75,6.79 JP9.2
N$22
  Bottom 0.2: IC5.45 25.25,37 24.75,37.5 24.75,37.75 23.25,39.25 23.25,43.25 21.75,44.75 13.75,44.75 10.5,48 10.25,48 R8.2
N$23
  Bottom 0.2: IC5.44 25,36.5 24.25,37.25 24.25,37.5 22.75,39 22.75,43 21.5,44.25 13.25,44.25 11.25,46.25 R43.2
N$24
  Bottom 0.2: U$3.12 20,14.6 C40.2 18.7,14.35 R24.1 18.35,14.1 17.5,13.25 17.5,11.35 R25.1
N$25  (via drill 0.33)
  Top 0.4: X2.7 8.93,33.08 7.5,34.5 7.5,40.75 10,43.25 v10,50
  Bottom 0.2: C49.1 8.65,32.38 X2.7
  Bottom 0.4: v10,50 JP6.2
N$26
  Bottom 0.2: U$3.5 29.27,14.75 28.25,14.75 27.5,14 27.5,7.5 27,7 R28.1 25.75,7 25.5,7.25 25.5,16.5 26.75,17.75 26.75,19.75 28.25,21.25 R26.1
N$27  (via drill 0.33)
  Top 0.2: v18.5,24.25 TP6.P$1 16,23.25 16,21.5 13.5,19 12.01,19 X1.4
  Bottom 0.2: R40.1 5.65,17 R50.1 5.65,19.15 6,19.5 8,19.5 8.5,19 11.76,19 X1.4 | U$7.7 18.39,24.14 v18.5,24.25
N$28
  Bottom 0.2: R20.1 19,12.65 C40.1 20.43,13.33 U$3.11 23.42,13.33 23.75,13 23.75,7.25 24,7 R28.2
N$29
  Bottom 0.2: U$5.15 14.75,41.17 14.75,41 | 14.75,41 15,41 | 14.75,41 9.65,41 X2.1 7.66,40.7 R34.2
N$30
  Bottom 0.2: C41.1 R29.2 33.38,21.12 32.5,20.25 31.75,20.25 31.25,19.75 C42.2
N$31  (via drill 0.33)
  Top 0.2: v34.5,8.25 33.75,8.25 31.25,10.75 v31.25,16.5
  Bottom 0.2: v34.5,8.25 34.63,8.12 34.63,4.5 | v31.25,16.5 C42.1 | U$4.13 34.63,4.5 | R31.1 29.65,4.5 34.63,4.5
N$32
  Bottom 0.2: R15.1 19.25,17.35 C38.1 20.46,17.14 U$3.14 23.61,17.14 24.5,16.25 24.5,9.15 R22.2
N$33
  Bottom 0.2: U$4.3 33.5,9.72 33.5,7.5 31.25,5.25 28.5,5.25 28.25,5 20.5,5 19.65,4.15 R32.2 | R44.2 R32.2 | JP9.3 19.42,4.23 R32.2
N$34  (via drill 0.33)
  Top 0.2: v18.5,22.75 TP7.P$1 16.5,22.25 16.5,21.25 13,17.75 9.48,17.75 X1.5
  Bottom 0.2: R50.2 7.35,17 R39.1 8.27,17.61 X1.5 | 16.81,23 U$7.6 18.39,22.86 v18.5,22.75
N$36
  Bottom 0.2: U$5.14 12.37,39.91 X2.2 7.28,39.42 R34.1
N$37
  Bottom 0.2: U$5.10 14.82,34.75 13.75,34.75 13.25,35.25 13.25,37 12.1,38.16 X2.3 5.91,38.16 5.5,37.75 R33.2
N$38
  Bottom 0.2: U$5.9 12.68,33.55 X2.6 6.16,34.34 5.25,35.25 R33.1
N$39
  Bottom 0.2: IC5.5 39.15,36.5 C43.2 39.5,38.1 Q4.3
N$40
  Bottom 0.2: U$5.1 18.95,42.45 17.25,40.75 17.25,35.5 16.75,35 16.75,33.5 16,32.75 14.5,32.75 11.5,29.75 11.5,28.5 4.5,21.5 4.5,16 8.25,16 8.6,16.34 X1.6 12,16.23 12,15.75 14.85,12.9 R18.2 15.65,12.25 R20.2
N$41
  Bottom 0.2: U$5.7 19.18,34.83 18.75,34.4 18.75,34 16.5,31.75 15,31.75 12.5,29.25 12.5,28 8,23.5 8,22.25 8.75,21.5 11.81,21.5 X1.2 13.75,19.57 13.75,16.5 14.25,16 14.9,16 R14.1 | R16.2 15.35,16.25 R14.1 | R14.1 14.6,15.9
N$42
  Bottom 0.4: J1.1 9.9,69.69 D5.A 11.4,66.5 Q1.3
N$43
  Bottom 0.2: R13.1 63.88,4.4 LED1.A
N$44
  Bottom 0.2: R35.1 16.15,64.75 | 16.15,64.75 R30.1 | 14.95,64.75 16.15,64.75
  Bottom 0.4: Q1.1 14.95,64.75
N$45
  Bottom 0.2: R38.2 23.5,62.75 15.79,70.46 J1.3 | R38.2 23.5,62 23.65,62.1 R38.2
N$46
  Bottom 0.2: IC5.13 38.25,32.5 39.25,31.5 C31.2 39.65,30.05 L1.2
N$47  (via drill 0.33)
  Top 0.2: v18,34.5 20,32.5 20,30 20.25,29.75 20.25,27.5 18.75,26 12,26 9.5,23.5 9.5,22.84 X1.1
  Bottom 0.2: R15.2 16,17.6 R14.2 15,20.25 12.75,22.5 9.54,22.5 X1.1 | U$5.6 19.34,36.09 18,34.75 v18,34.5
N$48
  Bottom 0.2: U$4.14 33.36,2.89 33.25,3 33.25,3.25 32.5,4 30.75,4 30,3.25 27.75,3.25 27.25,3.75 26.26,3.75 SJ1.2 26.11,4.15 R46.1 22.9,4 R32.1
N$49  (via drill 0.33)
  Top 0.2: v65.5,15.75 59,15.75 55.75,12.5 SV2.3
  Bottom 0.2: IC2.22 66.5,16 66.25,15.75 v65.5,15.75
N$50
  Bottom 0.2: U$5.2 18.68,41.17 17.75,40.25 17.75,35.25 17.25,34.75 17.25,33.25 16.25,32.25 14.75,32.25 12,29.5 12,28.25 7.5,23.75 7.5,22 9.26,20.25 X1.3 9.45,20.25 12,20.25 13.25,19 13.25,15.75 14.4,14.6 R18.1 15.35,14.25 R24.2
N$51  (via drill 0.33)
  Top 0.2: v64.75,16.5 64,17.25 58.25,17.25 56.25,15.25 54.21,15.25 SV2.2
  Bottom 0.2: IC2.23 v64.75,16.5
N$52
  Top 0.4: JP4.2 22.75,65.75 20.5,68 15.1,68 13.6,69.5 13.6,70.15 J1.2
  Bottom 0.2: J1.2 13.6,70.5
  Bottom 0.4: 13.6,70.5 D5.C
N$54
  Bottom 0.2: R45.1 26.01,2 SJ1.1
N$57  (via drill 0.33)
  Top 0.2: v18.5,28 TP9.P$1 16,29 16,32.5 13,35.5 9.46,35.5 X2.5
  Bottom 0.2: R49.2 9.13,35.4 X2.5 | U$6.6 18.39,28.11 v18.5,28
N$58  (via drill 0.33)
  Top 0.2: v18.5,29.5 TP8.P$1 16.5,30 16.5,32.75 12.5,36.75 12.03,36.75 X2.4
  Bottom 0.2: R49.1 11.68,37.1 X2.4 | U$6.7 18.39,29.39 v18.5,29.5
N$61
  Bottom 0.2: 23.75,67.6 D3.A
  Bottom 0.4: 23.75,67.6 23.75,67.25 25,66 Q3.3
  Bottom 0.5: D3.A 23.21,68.44 X7.1
N$62
  Bottom 0.2: R47.1 28.65,64 | Q3.1 28.65,64 | 28.65,64 28.65,62.55 R48.1
NRST_RES  (via drill 0.33)
  Top 0.2: v34,35.5 33,36.5 29.5,36.5 27.5,38.5 27,38.5 20,45.5 20,48.19 JP7.4
  Bottom 0.2: C68.1 38.5,34.4 38.5,35.25 38.25,35.5 IC5.7 v34,35.5
PWM  (via drill 0.33)
  Top 0.2: v24.75,34.25 24.75,36.25 13.75,47.25 13.75,58.25 v18,62.5
  Bottom 0.2: IC5.39 25,34 v24.75,34.25 | v18,62.5 18,63.9 R35.2
R
  Bottom 0.2: IC2.8 73.74,10.24 70.75,7.25 70.3,7.25 R5.2
R_RES  (via drill 0.33)
  Top 0.2: v12.75,50.75 12.75,52.75 11.25,54.25 v11.25,57.25
  Bottom 0.2: IC5.51 29,42.25 26.5,44.75 25,44.75 24.75,45 24.75,49.25 23,51 13,51 v12.75,50.75 | R37.2 9.5,56.75 10,57.25 v11.25,57.25
RES  (via drill 0.33)
  Top 0.2: TP3.P$1 v33.5,25.75
  Bottom 0.2: IC5.21 v33.5,25.75 33.5,24.25 33.38,24.12 R29.1
RST  (via drill 0.33)
  Top 0.2: JP1.4 63.25,25 69.5,18.75 71.75,18.75 v74.75,15.75
  Bottom 0.2: C69.1 72.75,8.5 74.25,10 IC2.7 74.25,15.25 v74.75,15.75
RX  (via drill 0.33)
  Top 0.2: v71,15.75 70,16.75 67,16.75 62.5,21.25 v48.75,21.25 TP15.P$1
  Bottom 0.2: U$1.7 48.63,21.36 v48.75,21.25 | v71,15.75 68.75,13.5 IC2.17
RX1_RES
  Bottom 0.2: JP3.4 31.75,45.25 32.98,44.02 33,44.02 IC5.59
RX2_RES  (via drill 0.33)
  Top 0.2: v39.25,22.75 v37.75,22.75 TP2.P$1
  Bottom 0.2: IC5.17 37,29 38,28 38,23 v37.75,22.75 | v39.25,22.75 40.81,22.75 U$1.3
SCK
  Bottom 0.2: JP3.8 31,41.19 IC5.55
SIN  (via drill 0.33)
  Top 0.2: TP4.P$1 v32,26.75
  Bottom 0.2: R19.2 C37.1 | R19.2 30.65,23.35 30.75,23.25 31.9,23.25 R21.1 | IC5.24 v32,26.75 32,26.5 29.5,24 R19.2
SWCLK  (via drill 0.33)
  Top 0.2: JP1.1 53.94,26.19 56.62,28.88 63.12,28.88 71,21 v77,21
  Bottom 0.2: v77,21 IC2.49
SWCLK_RES
  Bottom 0.2: IC5.49 28,41.25 28.25,41.5 28.25,42.25 26.5,44 23.25,44 22,45.25 15,45.25 12.5,47.75 12.5,48.19 JP7.1
SWDIO  (via drill 0.33)
  Top 0.2: JP1.3 59.02,25.77 60.62,27.38 62.38,27.38 70,19.75 v76.25,19.75
  Bottom 0.2: IC2.46 v76.25,19.75
SWDIO_RES  (via drill 0.33)
  Top 0.2: JP7.3 17.52,45.98 26.5,37 v27.25,37
  Bottom 0.2: v27.25,37 26.75,37.5 IC5.46
TACHO  (via drill 0.33)
  Top 0.2: v36.25,38 36.5,38 37.75,39.25 37.75,43.5 36.5,44.75 36.5,48 35,49.5 v35,50.25 | v29.5,52.75 v29.5,50.75
  Bottom 0.2: IC5.2 v36.25,38 | 35,50.75 36.25,50.75 R51.2 | R38.1 23.5,57.75 23.25,57.5 23.25,54.5 23.75,54 28.25,54 v29.5,52.75 | v29.5,50.75 35,50.75 | 35,50.75 v35,50.25
TIM1_1
  Bottom 0.2: IC2.41 73.74,25.49 79.25,31 IC1.18
TIM1_1N
  Bottom 0.2: IC2.34 70.25,25.5 80.25,35.5 89.75,35.5 90.5,36.25 93.75,36.25 94.5,37 IC1.15
TIM1_2
  Bottom 0.2: IC2.42 74.24,25.24 78,29 IC1.19
TIM1_2N
  Bottom 0.2: IC2.35 70.75,25.25 80.5,35 IC1.16
TIM1_3
  Bottom 0.2: IC2.43 74.74,24.99 76.75,27 91,27 IC1.20
TIM1_3N
  Bottom 0.2: IC2.36 71.25,25 79.25,33 IC1.17
TIM1_A  (via drill 0.33)
  Top 0.2: v16.5,39.25 17.75,38 22,38 v23.5,36.5
  Bottom 0.2: U$5.13 15.87,38.63 v16.5,39.25 | v23.5,36.5 24.5,35.5 IC5.42
TIM1_B  (via drill 0.33)
  Top 0.2: v16.5,35.75 18.25,37.5 21.5,37.5 v23.5,35.5
  Bottom 0.2: U$5.11 15.5,36.09 15.85,36.09 16.16,36.09 v16.5,35.75 | v23.5,35.5 24,35 IC5.41
TIM3_A
  Bottom 0.2: IC5.38 24.5,33.5 22.75,35.25 22.75,38.25 21.25,39.75 20.25,39.75 20.16,39.85 U$5.3
TIM3_B  (via drill 0.33)
  Top 0.2: v18.5,36.75 20,36.75 v23.75,33
  Bottom 0.2: U$5.5 19.11,37.37 v18.5,36.75 | v23.75,33 IC5.37
TX  (via drill 0.33)
  Top 0.2: v72.75,15.75 70.75,17.75 68.25,17.75 63.75,22.25 54,22.25 53.5,22.75 v48.75,22.75 TP16.P$1
  Bottom 0.2: U$1.6 48.87,22.64 v48.75,22.75 | v72.75,15.75 69.75,12.75 IC2.16
TX1_RES
  Bottom 0.2: JP3.5 29.75,47.27 29.75,45.25 32.5,42.5 IC5.58
TX2_RES  (via drill 0.33)
  Top 0.2: TP1.P$1 v37.75,21.25
  Bottom 0.2: IC5.16 38.25,31 38.5,30.75 38.5,22 | 38.5,22 39.13,21.36 U$1.2 | v37.75,21.25 38.5,22
U
  Bottom 1: C1.2 IC1.8
  pour Bottom (no thermals): 77,72 77.5,72.5 79.5,72.5 80,72 80,64.25 93,51.25 93,50.5 90.75,50.5 77,64.25
  pour Top (no thermals): 77,72 77.5,72.5 79.5,72.5 80,72 80,64.25 93,51.25 93,50.5 90.75,50.5 77,64.25
USART3_RX  (via drill 0.33)
  Top 0.2: v28.5,30.25 28.5,29 25,25.5 v24.5,25.5
  Bottom 0.2: IC5.30 29,29.75 v28.5,30.25 | U$7.1 24.41,25.41 v24.5,25.5
USART3_TX
  Bottom 0.2: U$7.4 23.84,21.59 24.25,22 24.25,23.5 25,24.25 26.5,24.25 29.5,27.25 IC5.29
USART3_TXEN
  Bottom 0.2: U$7.3 U$7.2 24.14,24.14 25.25,25.25 25.25,25.75 24.75,26.25 24.75,29.75 IC5.33
USART5_RX  (via drill 0.33)
  Top 0.2: v30.75,34.75 28.75,34.75 28,34 26.75,34 23.5,30.75 v21.25,30.75
  Bottom 0.2: IC5.54 30.5,35 v30.75,34.75 | U$6.1 21.34,30.66 v21.25,30.75
USART5_TX  (via drill 0.33)
  Top 0.2: v21.25,27 27.25,33 29.5,33 v30,33.5
  Bottom 0.2: U$6.4 21.34,26.84 v21.25,27 | v30,33.5 IC5.53
USART5_TXEN
  Bottom 0.2: U$6.3 U$6.2 22.94,29.5 23.75,29.5 24.5,30.25 24.5,30.75 25.25,31.5 IC5.34
USB_DM
  Bottom 0.2: JP11.2 5.9,50.6 6.75,49.75 6.75,47.25 7.75,46.25 R43.1
USB_DP
  Bottom 0.2: R8.1 7.75,48.25 7.25,48.75 7.25,50.25 6.25,51.25 JP11.3
USB_SHIELD
  pour Bottom: 0,55 6,55 6,46.25 0,46.25
  pour Top: 0,55 6,55 6,46.25 0,46.25
V
  Bottom 1: 91.6,57.01 IC1.5 C2.2
  pour Bottom (no thermals): 82,72 82.5,72.5 84.5,72.5 85,72 85,65.25 93,57.25 93,56.5 90.75,56.5 82,65.25
  pour Top (no thermals): 82,72 82.5,72.5 84.5,72.5 85,72 85,65.25 93,57.25 93,56.5 90.75,56.5 82,65.25
V+
  Top 0.5: 62.25,73.5 62.25,74.25 68.75,74.25 72,71 72,70.5
  Bottom 0.5: 96.58,47.02 IC1.10 | 62.25,74.25 60.04,74.25 R1.P$1 | 72,70.67 72,71 68.75,74.25 62.25,74.25 | R42.1 62.25,74.25
  pour Top (no thermals): 70.5,72 70.5,51.75 76.25,46 97.5,46 98,46.5 98,48 97.5,48.5 89.75,48.5 74,64.25 74,72 73.5,72.5 71,72.5
  pour Bottom (no thermals): 70.5,72 70.5,51.75 76.25,46 97.5,46 98,46.5 98,48 97.5,48.5 89.75,48.5 74,64.25 74,72 73.5,72.5 71,72.5
V-
  Top 0.5: 62.25,66 67,66 67,70.5
  Bottom 0.4: R42.2 62.25,66 | 67,70.5 66.96,70.54
  Bottom 0.5: 62.25,66 67,66 67,70.5
  pour Bottom (no thermals): 65,72 65.5,72.5 67.75,72.5 68.5,71.75 68.5,50.75 75.25,44 92.5,44 93,43.5 93,42 92.5,41.5 65,41.5
  pour Top (no thermals): 65,72 65.5,72.5 67.75,72.5 68.5,71.75 68.5,50.75 75.25,44 92.5,44 93,43.5 93,42 92.5,41.5 65,41.5
VLT
  Bottom 0.2: IC2.25 66,17.5 65.5,18 C9.2 59.25,18.15 D2.C 58.7,18.55 57.75,19.5 57.75,44.5 54.25,48 54.25,53.8
  Bottom 0.3: 53.24,53.96 R2.1
  Bottom 0.5: R12.P$2 53.24,53.96 | R2.1 54.25,53.8 R9.1
VTH
  Bottom 0.2: 67.62,28.62 76.75,37.75 93.25,37.75 IC1.13 | 67.62,28.62 61,22 61,20 61.35,19.65 C19.1 63.15,19 66,19 67,18 IC2.26 | R4.2 68.5,27.75 67.62,28.62
W
  Bottom 1: C3.2 IC1.2
  pour Top (no thermals): 87,72 87.5,72.5 89.5,72.5 90,72 90,66.25 93,63.25 93,62.5 90.75,62.5 87,66.25
  pour Bottom (no thermals): 87,72 87.5,72.5 89.5,72.5 90,72 90,66.25 93,63.25 93,62.5 90.75,62.5 87,66.25
Y
  Bottom 0.2: IC2.9 73.24,10.49 70.75,8 69.25,8 68.5,7.25 65.75,7.25 65.5,7 R13.2

## Text on the board
tStop: STMBL / V3.2
bStop: STMBL / V3.2
tSilk: -BRAKE+ | -24V+ | -HV+ | U V W | - + T / FAN | G | 12V 24V 5V 0V | R | USB | C G D R | 3V MI TX RC TD / 0V SC MO RX 5V | CMD | 3V 0V 15V | RS485 / A B | C S R G | RS485 / A B | C G D R | TXRX | RXTX | FB | 3V A5 A6 A7 0V | 0V 3V | 12V 5V | G | Y | R | RES:||